# EAGLE board SparkFun_Dev_ESP32_C3_PTH (EAGLE 9.6.2)

Size 17.78 x 33.02 mm. Coordinates in mm from the lower left corner, seen from the top.
Outline: 0,33.02 0,0 17.78,0 17.78,33.02 0,33.02
Copper layers (1+2*15+16): Top 0.035559375mm / dielectric 0.47751875mm / Route2 0.035559375mm / dielectric 0.47751875mm / Route15 0.035559375mm / dielectric 0.47751875mm / Bottom 0.035559375mm
Design rules "SparkFun-4-Layer-General-JLCPCB": minimum track width 7mil, minimum drill 12mil, track to track 7mil, track to pad 7mil, pad to pad 7mil, via to via 7mil, smd to smd 7mil, copper to edge 7mil, drill to drill 7mil, minimum pad ring 7mil, minimum via ring 7mil, stop-mask expansion 3mil, vias tented up to drill 25mil, thermal gap 10mil
Net classes: 1 Power: width 0.127 mm, clearance 0.178 mm
tRestrict: area 17.8,19.6 to 18,19.8
bRestrict: area 8.1,8.1 to 8.4,8.4

## Footprints (pad centres in the part's own frame; a part is rotated, then mirrored left to right if it is on the bottom)
TACTILE_SWITCH_SMD_4.6X2.8MM = smd 0.9 x 1: 1 -2.05,-0.8; 2 2.05,-0.8; 3 2.05,0.8; 4 -2.05,0.8
0402-TIGHT = smd 0.6 x 0.6: 1 -0.5,0; 2 0.5,0
LED-0603 = smd 1 x 1: A -0.877,0; C 0.877,0
CHIP_ANT_NO_COURTYARD = smd 1.5 x 0.6: P1 -1.79,-0.97; P2 1.71,-0.97; P3 1.71,0.63; P4 -1.79,0.63
FIDUCIAL-MICRO = smd 0.635 x 0.635: 1 0,0
SMT-JUMPER_3_2-NC_TRACE_SILK = smd 0.66 x 1.27: 1 -1.041,0; 2 0,0; 3 1.041,0
USB-C-16P_4LAYER-PADS = smd 0.3 x 1: A5 -1.25,-0.34; A6 -0.25,-0.34; A7 0.25,-0.34; A8 1.25,-0.34; B5 1.75,-0.34; B6 0.75,-0.34; B7 -0.75,-0.34; B8 -1.75,-0.34 | smd 0.6 x 1: GND -3.225,-0.34; GND2 3.225,-0.34; VBUS1 -2.45,-0.34; VBUS2 2.45,-0.34 | drill 0.4 pad 0.6 long: SHLD1 -4.318,-0.915; SHLD2 4.318,-0.915; SHLD3 -4.318,-5.095; SHLD4 4.318,-5.095 | hole 0.65: -2.89,-1.445; 2.89,-1.445
1X10_NO_SILK = drill 1.016 pad 1.88: 1 0,0; 2 2.54,0; 3 5.08,0; 4 7.62,0; 5 10.16,0; 6 12.7,0; 7 15.24,0; 8 17.78,0; 9 20.32,0; 10 22.86,0
JST04_1MM_RA = smd 0.6 x 1.35: 1 -1.5,0; 2 -0.5,0; 3 0.5,0; 4 1.5,0 | smd 1.2 x 2: NC1 2.8,-3.675; NC2 -2.8,-3.675
1X12_NO_SILK_KIT = drill 1.016 pad 1.88: 1 0,0; 2 2.54,0; 3 5.08,0; 4 7.62,0; 5 10.16,0; 6 12.7,0; 7 15.24,0; 8 17.78,0; 9 20.32,0; 10 22.86,0; 11 25.4,0; 12 27.94,0
USB-SOLDER-PADS = smd 3 x 0.9: D+ 0,-0.889; D- 0,0.889; GND 0,-2.667; VBUS 0,2.667
SMT-JUMPER_2_NC_TRACE_SILK = smd 0.66 x 1.27: 1 -0.521,0; 2 0.521,0
PAD.03X.05 = smd 1.27 x 1.27: 1 0,0
QFN32 = smd 3.75 x 3.75: GND 0,0 | smd 0.7 x 0.28: P1 -2.5,1.75; P2 -2.5,1.25; P3 -2.5,0.75; P4 -2.5,0.25; P5 -2.5,-0.25; P6 -2.5,-0.75; P7 -2.5,-1.25; P8 -2.5,-1.75; P17 2.5,-1.75; P18 2.5,-1.25; P19 2.5,-0.75; P20 2.5,-0.25; P21 2.5,0.25; P22 2.5,0.75; P23 2.5,1.25; P24 2.5,1.75 | smd 0.28 x 0.7: P9 -1.75,-2.5; P10 -1.25,-2.5; P11 -0.75,-2.5; P12 -0.25,-2.5; P13 0.25,-2.5; P14 0.75,-2.5; P15 1.25,-2.5; P16 1.75,-2.5; P25 1.75,2.5; P26 1.25,2.5; P27 0.75,2.5; P28 0.25,2.5; P29 -0.25,2.5; P30 -0.75,2.5; P31 -1.25,2.5; P32 -1.75,2.5
SOT23-5 = smd 0.55 x 1.2: 1 -0.95,-1.3; 2 0,-1.3; 3 0.95,-1.3; 4 0.95,1.3; 5 -0.95,1.3
CRYSTAL-SMD-2X2.5MM = smd 1.2 x 1.1: P1 0.846,0.69; P2 -0.854,0.69; P3 -0.854,-0.71; P4 0.846,-0.71

## Placement (x,y rotation side)
BOOT  MOMENTARY-SWITCH-SPST-SMD-4.6X2.8MM  [TACTILE_SWITCH_SMD_4.6X2.8MM]  13.97,21.59 90 top
C1  2.2uF  [0402-TIGHT]  11.43,22.86 0 top
C2  2.2uF  [0402-TIGHT]  11.43,20.32 0 top
C3  9.1pF  [0402-TIGHT]  2.54,16.51 90 top
C4  9.1pF  [0402-TIGHT]  5.08,13.97 0 top
C5  0.1uF  [0402-TIGHT]  6.35,21.59 0 top
C7  0.1uF  [0402-TIGHT]  11.43,19.05 0 top
C8  0.1uF  [0402-TIGHT]  5.08,12.7 180 top
C9  10nF  [0402-TIGHT]  5.08,11.43 180 top
D1  RED  [LED-0603]  2.03,31.88 0 top
D2  BLUE  [LED-0603]  16.12,31.75 180 top
E1  WIFI_CHIP_ANT  [CHIP_ANT_NO_COURTYARD]  3.81,1.27 180 top
FD1  FIDUCIALUFIDUCIAL  [FIDUCIAL-MICRO]  5.08,25.4 0 top
FD2  FIDUCIALUFIDUCIAL  [FIDUCIAL-MICRO]  5.08,25.4 0 bottom
FD3  FIDUCIALUFIDUCIAL  [FIDUCIAL-MICRO]  13.97,7.62 0 top
FD4  FIDUCIALUFIDUCIAL  [FIDUCIAL-MICRO]  13.97,7.62 0 bottom
FRAME2  FRAME-LEDGER  [CREATIVE_COMMONS]  -12.7,-25.4 0 top  (outside the outline)
I2C  JUMPER-SMT_3_2-NC_TRACE_SILK  [SMT-JUMPER_3_2-NC_TRACE_SILK]  11.43,3.81 180 bottom
J1  USB Female Type C Connector  [USB-C-16P_4LAYER-PADS]  8.89,26.67 180 top
J2  [1X10_NO_SILK]  1.27,6.35 90 top
J4  QWIIC_RIGHT_ANGLE  [JST04_1MM_RA]  11.43,5.08 0 top
J6  [1X12_NO_SILK_KIT]  16.51,29.21 270 bottom
JP14  USB_SOLDER_PADS  [USB-SOLDER-PADS]  8.89,31.11 270 bottom
LOGO1  SFE_LOGO_NAME_FLAMEBLANK  [BLANK]  -10.16,-25.4 0 top  (outside the outline)
LOGO2  QWIIC_LOGO_3MM  [QWIIC_3MM]  11.43,6.35 0 top
LOGO3  OSHW-LOGOS  [OSHW-LOGO-S]  5.08,8.89 0 bottom
PWR  JUMPER-SMT_2_NC_TRACE_SILK  [SMT-JUMPER_2_NC_TRACE_SILK]  2.41,31.75 0 bottom
R1  4.7k  [0402-TIGHT]  3.43,30.1 90 top
R2  1k  [0402-TIGHT]  14.73,29.72 90 top
R3  2.2k  [0402-TIGHT]  11.43,7.62 180 top
R4  2.2k  [0402-TIGHT]  11.43,8.89 0 top
R5  5.1k  [0402-TIGHT]  6.35,24.13 0 top
R6  5.1k  [0402-TIGHT]  11.43,24.13 180 top
R7  100k  [0402-TIGHT]  13.97,15.24 270 top
R9  100k  [0402-TIGHT]  11.43,10.16 0 top
R11  100k  [0402-TIGHT]  6.35,22.86 180 top
RESET  MOMENTARY-SWITCH-SPST-SMD-4.6X2.8MM  [TACTILE_SWITCH_SMD_4.6X2.8MM]  3.81,21.59 270 top
SHLD  JUMPER-SMT_2_NC_TRACE_SILK  [SMT-JUMPER_2_NC_TRACE_SILK]  8.89,27.05 270 bottom
STAT  JUMPER-SMT_2_NC_TRACE_SILK  [SMT-JUMPER_2_NC_TRACE_SILK]  15.88,31.75 180 bottom
TP1  TEST-POINT3X5  [PAD.03X.05]  13.97,13.97 0 bottom
TP2  TEST-POINT3X5  [PAD.03X.05]  13.97,11.43 0 bottom
TP3  TEST-POINT3X5  [PAD.03X.05]  13.97,8.89 0 bottom
TP4  TEST-POINT3X5  [PAD.03X.05]  11.43,8.89 0 bottom
TP5  TEST-POINT3X5  [PAD.03X.05]  11.43,11.43 0 bottom
TP6  TEST-POINT3X5  [PAD.03X.05]  11.43,13.97 0 bottom
U1  ESP32-C3_SOC  [QFN32]  10.16,15.24 90 top
U2  RT9080-33GJ5  [SOT23-5]  8.89,21.59 180 top
U$24  [ORDERING_INSTRUCTIONS]  35.56,50.8 0 top  (outside the outline)
Y1  40MHZ  [CRYSTAL-SMD-2X2.5MM]  5.08,16.51 90 top

## Library data of the parts
BOOT RESET = SparkFun-Switches; PROD_ID: SWCH-15606
C1 C2 = SparkFun-Capacitors; PROD_ID: CAP-14232
C3 C4 = SparkFun-Capacitors; MOUSER_PART: 609-500R07S9R1CV4T; PROD_ID: CAP-15278
C5 = SparkFun-Capacitors; PROD_ID: CAP-14993
C7 C8 = SparkFun-Capacitors; PROD_ID: CAP-12416
C9 = SparkFun-Capacitors; PROD_ID: CAP-14847
D1 = SparkFun-LED; PROD_ID: DIO-17976
D2 = SparkFun-LED; PROD_ID: DIO-08575
E1 U1 = ESP32-C3-MINI-1
FD1-FD4 LOGO1-LOGO3 U$24 = SparkFun-Aesthetics
FRAME2 = SparkFun-Aesthetics; DESIGNER: Elias Santistevan; REV: v01
I2C PWR SHLD STAT = SparkFun-Jumpers
J1 = SparkFun-Connectors; PROD_ID: CONN-14122
J2 J6 JP14 TP1-TP6 = SparkFun-Connectors
J4 = SparkFun-Connectors; PROD_ID: CONN-13694
R1 = SparkFun-Resistors; PROD_ID: RES-15343
R2 = SparkFun-Resistors; PROD_ID: RES-14342
R3 R4 = SparkFun-Resistors; PROD_ID: RES-14341
R5 R6 = SparkFun-Resistors; PROD_ID: RES-14340
R7 R9 R11 = SparkFun-Resistors; PROD_ID: RES-13495
U2 = SparkFun-IC-Power; PROD_ID: VREG-19034
Y1 = SparkFun-Clocks; PROD_ID: XTAL-15127

## Nets
3.3V: C2.1 C7.1 C8.1 C9.1 I2C.2 J4.2 J6.4 PWR.2 R7.2 R9.2 R11.2 U1.P2 U1.P3 U1.P11 U1.P17 U1.P31 U1.P32 U2.5
ANT: E1.P1 U1.P1
EN: C5.1 J6.3 R11.1 RESET.3 RESET.4 TP5.1 U1.P7
GND: BOOT.1 BOOT.2 C1.2 C2.2 C3.1 C4.1 C5.2 C7.2 C8.2 C9.2 E1.P3 E1.P4 J1.GND J1.GND2 J2.7 J2.8 J4.1 J6.2 JP14.GND R1.1 R2.1 R5.1 R6.1 RESET.1 RESET.2 SHLD.2 TP2.1 U1.GND U2.2 Y1.P2 Y1.P4
IO0/A0: J6.8 U1.P4
IO1/A1: J6.7 U1.P5
IO2/POCI: J6.10 R9.1 U1.P6
IO3/A3: J6.6 U1.P8
IO4/A4/MTMS: J6.5 TP4.1 U1.P9
IO5/A5/MTDI: J6.12 TP6.1 U1.P10
IO6/SCLK/MTCK: J6.9 TP3.1 U1.P12
IO7/PICO/MTDO: J6.11 TP1.1 U1.P13
IO8: R7.1 U1.P14
IO9/BOOT: BOOT.3 BOOT.4 U1.P15
IO10: J2.4 U1.P16
IO12: J2.3 U1.P19
IO13/SDA: J2.6 J4.3 R3.1 U1.P20
IO14/SCL: J2.5 J4.4 R4.2 U1.P21
IO15: J2.2 U1.P22
IO16: J2.1 U1.P23
IO17: U1.P24
IO18/USB_N: J1.A7 J1.B7 JP14.D- U1.P25
IO19/USB_P: J1.A6 J1.B6 JP14.D+ U1.P26
IO20/TXO: J2.10 U1.P27
IO21/RXI: J2.9 U1.P28
N$1: D1.C R1.2
N$2: D1.A PWR.1
N$3: D2.C R2.2
N$4: I2C.3 R3.2
N$5: I2C.1 R4.1
N$6: STAT.2
N$7: J1.B5 R5.2
N$8: J1.A5 R6.2
N$9: C3.2 U1.P29 Y1.P1
N$10: C4.2 U1.P30 Y1.P3
N$11: D2.A STAT.1
SHLD: J1.SHLD1 J1.SHLD2 J1.SHLD3 J1.SHLD4 SHLD.1
V_USB: C1.1 J1.VBUS1 J1.VBUS2 J6.1 JP14.VBUS U2.1 U2.3

## Tracks (layer width: path | path; a pad name or v marks a point on that pad's centre or on a via)
3.3V  (17 unrouted)
ANT  (1 unrouted)
EN  (6 unrouted)
GND  (30 unrouted)
IO0/A0  (1 unrouted)
IO1/A1  (1 unrouted)
IO2/POCI  (2 unrouted)
IO3/A3  (1 unrouted)
IO4/A4/MTMS  (2 unrouted)
IO5/A5/MTDI  (2 unrouted)
IO6/SCLK/MTCK  (2 unrouted)
IO7/PICO/MTDO  (2 unrouted)
IO8  (1 unrouted)
IO9/BOOT  (2 unrouted)
IO10  (1 unrouted)
IO12  (1 unrouted)
IO13/SDA  (3 unrouted)
IO14/SCL  (3 unrouted)
IO15  (1 unrouted)
IO16  (1 unrouted)
IO18/USB_N  (3 unrouted)
IO19/USB_P  (3 unrouted)
IO20/TXO  (1 unrouted)
IO21/RXI  (1 unrouted)
N$1  (1 unrouted)
N$2  (1 unrouted)
N$3  (1 unrouted)
N$4  (1 unrouted)
N$5  (1 unrouted)
N$7  (1 unrouted)
N$8  (1 unrouted)
N$9  (2 unrouted)
N$10  (2 unrouted)
N$11  (1 unrouted)
SHLD  (4 unrouted)
V_USB  (6 unrouted)

## Text on the board
Route2: 2
Route15: 3
Measures: Units: inches
tDocu: 4-layer / JLC7628 Stackup / Material: TG135-140 / 1oz outer layers / 0.5oz inner layers / Board thickness: 0.8mm / Soldermask: Red / Silkscreen: White / Surface Finish: Lead-Free HASL | Elias Santistevan